# Altium PCB ANT.PCBDOC
Units mil, origin at the board's own origin, x right, y up, seen from the top; angles counter-clockwise.
Board outline 1506.65 x 1125.16 mil, 2 copper layers (Top, Bottom), stack 12.7 mil thick; 2 components, 0 nets, 2 pads, 0 vias.
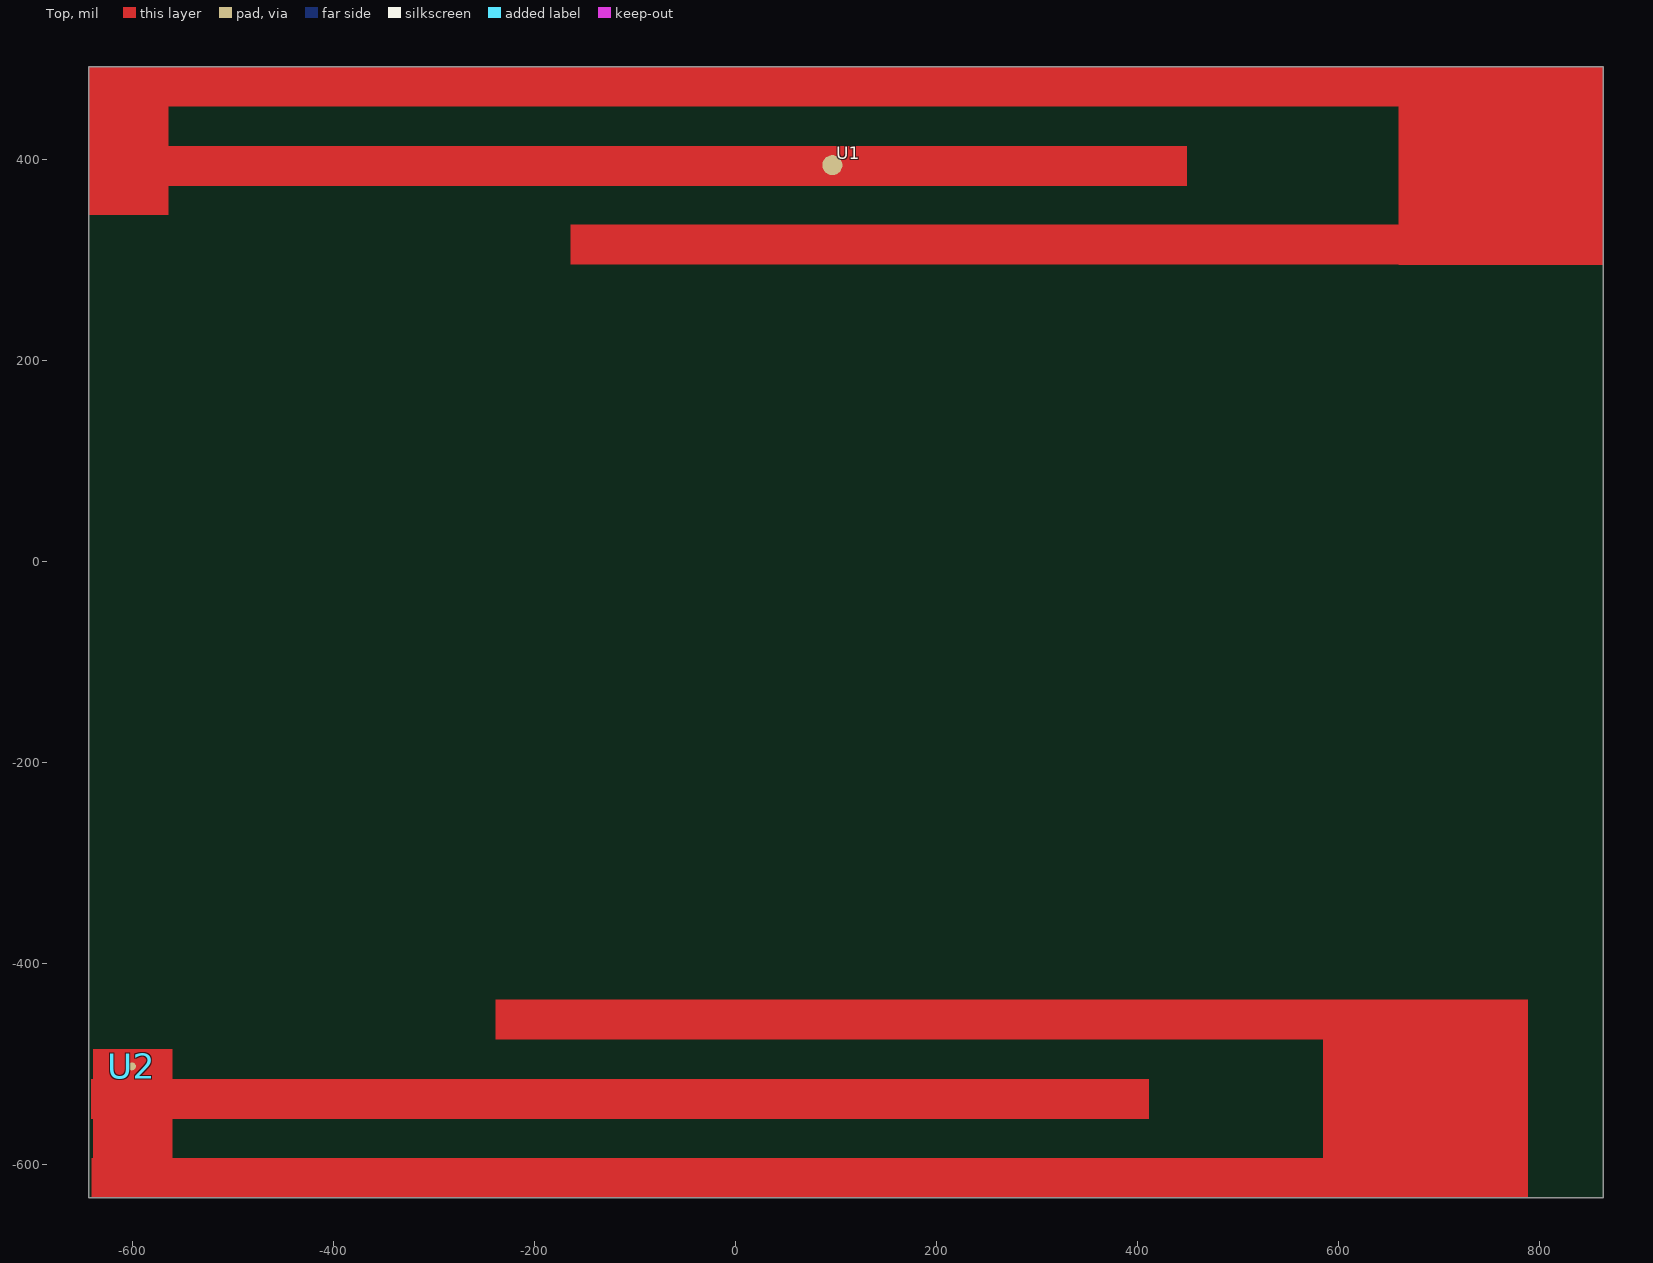
[diagram p0: Top view]
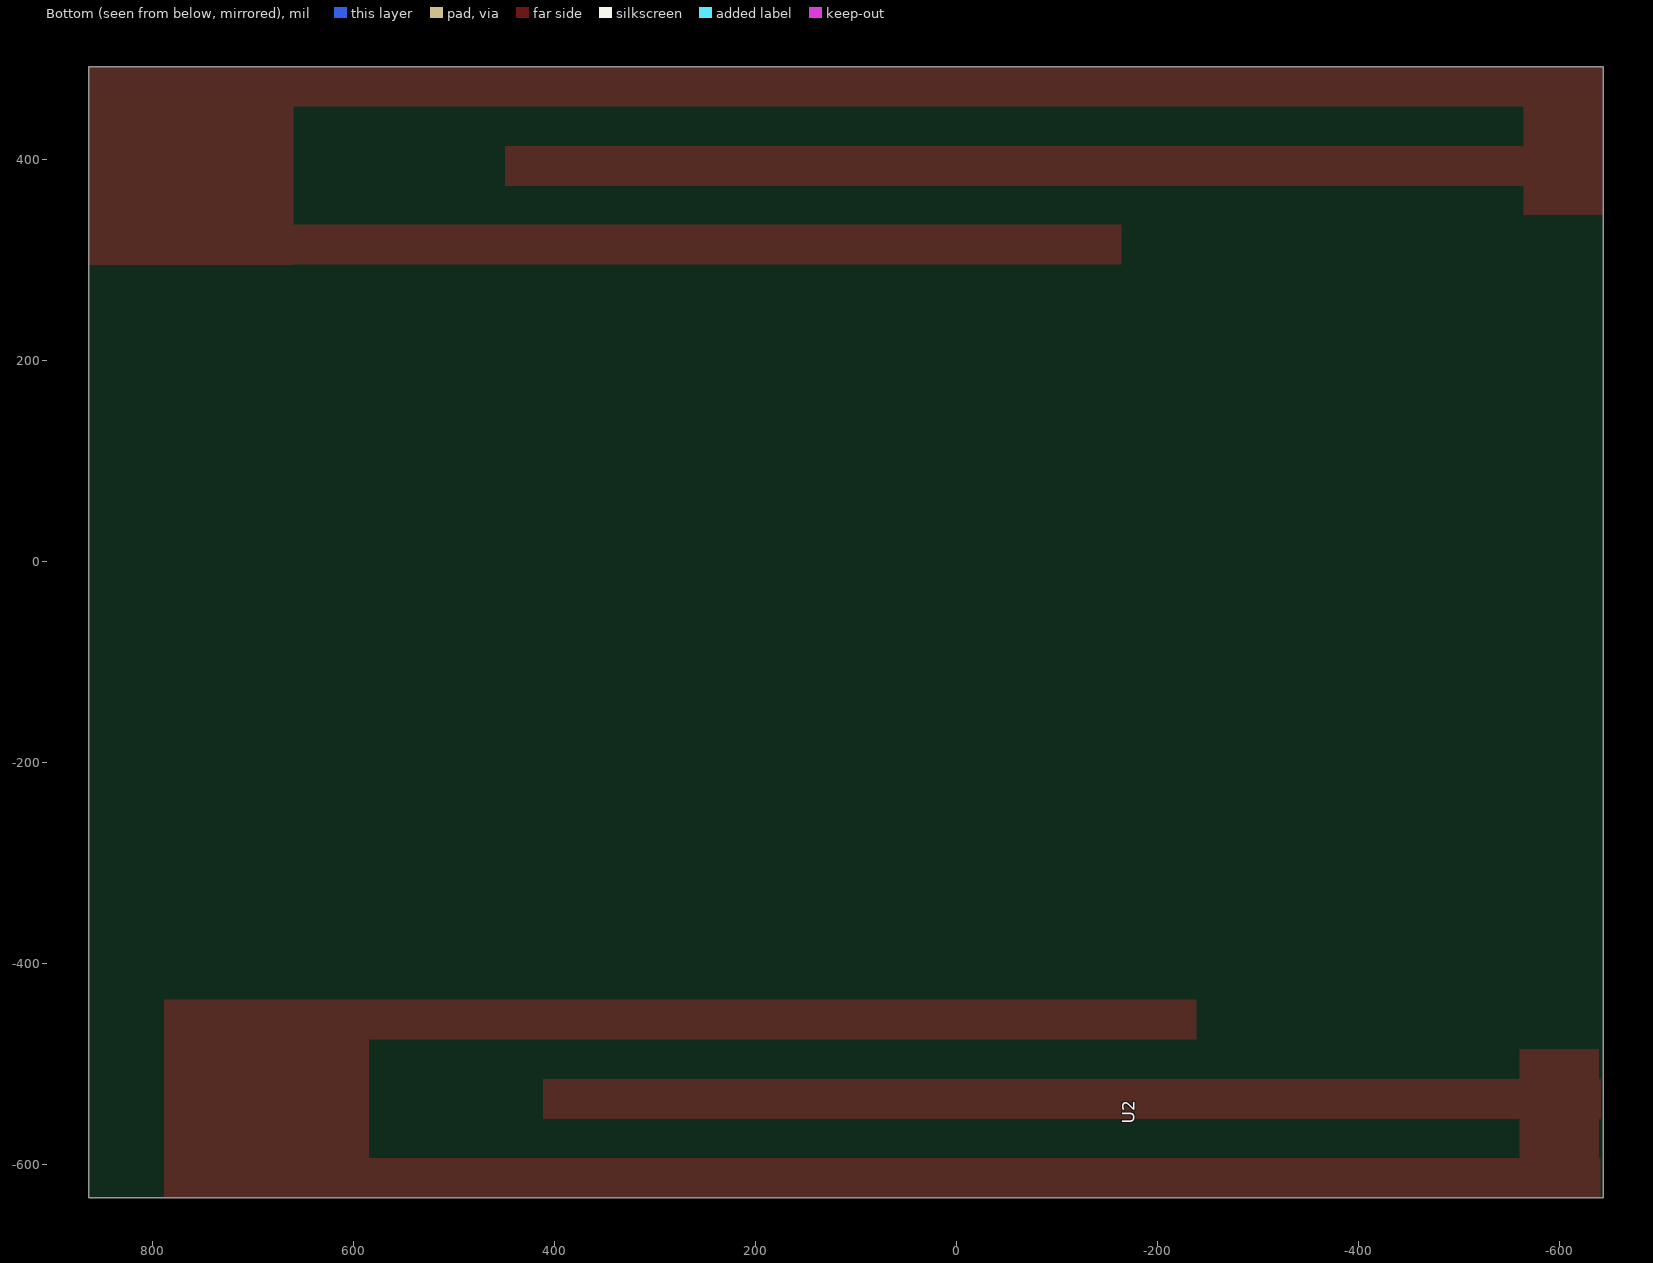
[diagram p1: Bottom view, seen from below]

## Layer stack, top to bottom
Top: signal copper 1.35
Dielectric: dielectric 10, FR-4, Dk 4.3
Bottom: signal copper 1.35

## Board outline
-643.74,-633.31 862.91,-633.31 862.91,491.85 -643.74,491.85

## Design rules (kind name [scope] priority, off if disabled: settings)
Clearance "'Default' PADS rule_18" [All] p1: gap=6
Clearance "'Default' PADS rule_15" [IsVia vs IsVia] p2: gap=6
ComponentClearance "'Default' PADS rule_12" [All] p1: gap=6 collisioncheckmode=3 verticalgap=10
FlightTimeFalling "'Default' PADS rule_10" [All] p1: maximum=10.00
FlightTimeRising "'Default' PADS rule_9" [All] p1: maximum=10.00
Length "'Default' PADS rule_5" [All] p1: maxlimit=50000 minlimit=0
MatchedLengths "'Default' PADS rule_11" [InNetClass('All Nets')] p1: tolerance=200 checknetsindiffpair=TRUE checkdiffpairvsdiffpair=TRUE checkothers=TRUE
MaxMinImpedance "'Default' PADS rule_8" [All] p1: minimum=50.00 maximum=150.0
ParallelSegment "'Default' PADS rule_7" [All] p1: limit=1000 gap=200
ParallelSegment "'Default' PADS rule_6" [All] p2: limit=1000 gap=200
PlaneClearance "'Default' PADS rule_14" [All] p1: clearance=6
PlaneConnect "Power Plane Connect Style - from global settings" [All] p1: planeconnectstyle=Relief reliefexpansion=20 reliefentries=2 reliefconductorwidth=15 reliefairgap=10
PolygonConnect [All] p1: connectstyle=Relief reliefconductorwidth=10 reliefentries=4 polygonreliefangle="90 Angle"
RoutingLayers "'Default' PADS rule_3" [All] p1: top layer_v5=TRUE bottom layer_v5=TRUE
RoutingPriority "'Default' PADS rule_2" [All] p1: routingpriority=3
RoutingTopology "'Default' PADS rule" [All] p1: topology=Shortest
RoutingVias "'Default' PADS rule_4" [All] p1: holewidth=37 width=55 viastyle="Through Hole" minholewidth=37 minwidth=55 maxholewidth=37 maxwidth=55
SMDToCorner "'Default' PADS rule_16" [All] p1: distance=60000
SMDToPlane "'Default' PADS rule_17" [All] p1: distance=60000
SolderMaskExpansion [All] p1: expansion=4
TestPointUsage [All] p1: valid=0 allowmultiple=FALSE
Testpoint [All] p1: side=15 testpointundercomponent=TRUE minsize=40 maxsize=100 preferedsize=60 minholesize=0 maxholesize=40 preferedholesize=32 testpointgrid=1 style=1023 order=0-112345678
Width "'Default' PADS rule_13" [All] p1: maxlimit=12 minlimit=12 preferedwidth=12
13 further rules are at their usual default settings.

## Components (designator, comment, footprint, x,y, rotation, side; value= is the part's Value field where it differs from the comment)
U1 "ANT-01" ANT-01 100,400 r0 top
U2 "ANT-02" ANT-02 -600,-500 r90 bottom

## Footprints (in the part's own frame and the unit in brackets; to place one, negate y for a bottom-side part, rotate by r counter-clockwise, add the part's x,y. Pads: shape width x height; smd on the part's side, far side on the other; paste and mask are expansions set on the pad)
ANT-01 [mil]
  round 20 smd: 1(-3.94,-5.91)
  Top region: 762.76,91.72 762.76,-105.12 559.3,-105.12 559.3,91.72 762.76,91.72
  Top region: 624.14,-65.37 624.14,-104.74 -264.46,-104.74 -264.46,-65.37 624.14,-65.37
  Top region: 762.91,91.85 762.91,52.49 -743.16,52.49 -743.16,91.85 762.91,91.85
  Top region: -664.93,-55.33 -743.74,-55.33 -743.74,89.58 -664.93,89.58 -664.93,-55.33
  Top region: 348.43,12.94 348.43,-26.43 -743.27,-26.43 -743.27,12.94 348.43,12.94
ANT-02 [mm]
  round 0.2 smd far side: 1(-0.066,-0.021)
  Bottom region: 1.614,30.084 -3.386,30.084 -3.386,35.252 1.614,35.252 1.614,30.084
  Bottom region: 1.614,9.176 0.614,9.176 0.614,32.107 1.614,32.107 1.614,9.176
  Bottom region: -2.386,-1.037 -3.386,-1.037 -3.386,31.231 -2.386,31.231 -2.386,-1.037
  Bottom region: -0.386,-1.045 -1.386,-1.045 -1.386,25.676 -0.386,25.676 -0.386,-1.045
  Bottom region: -3.316,-1.002 -3.316,1 0.364,1 0.364,-1.002 -3.316,-1.002

## Nets (pads, with @x,y where several pads share a name; then routed paths per layer and width w, separated by ;. In a path a pad name is that pad's centre, name@x,y a point inside that pad or via, vN(x,y) a via of type N, cw(c..) or ccw(c..) an arc to the next point about the centre after c; other vN are vias at no path point)
pads on no net: U1.1 U2.1